# Altium PCB PCB_FourtyPinyGPIOExpander_2021-05-04.pcbdoc
Units mil, origin at the board's own origin, x right, y up, seen from the top; angles counter-clockwise.
Board outline 3200 x 2205 mil, 2 copper layers (Top Layer, Bottom Layer); 17 components, 51 nets, 147 pads, 89 vias.
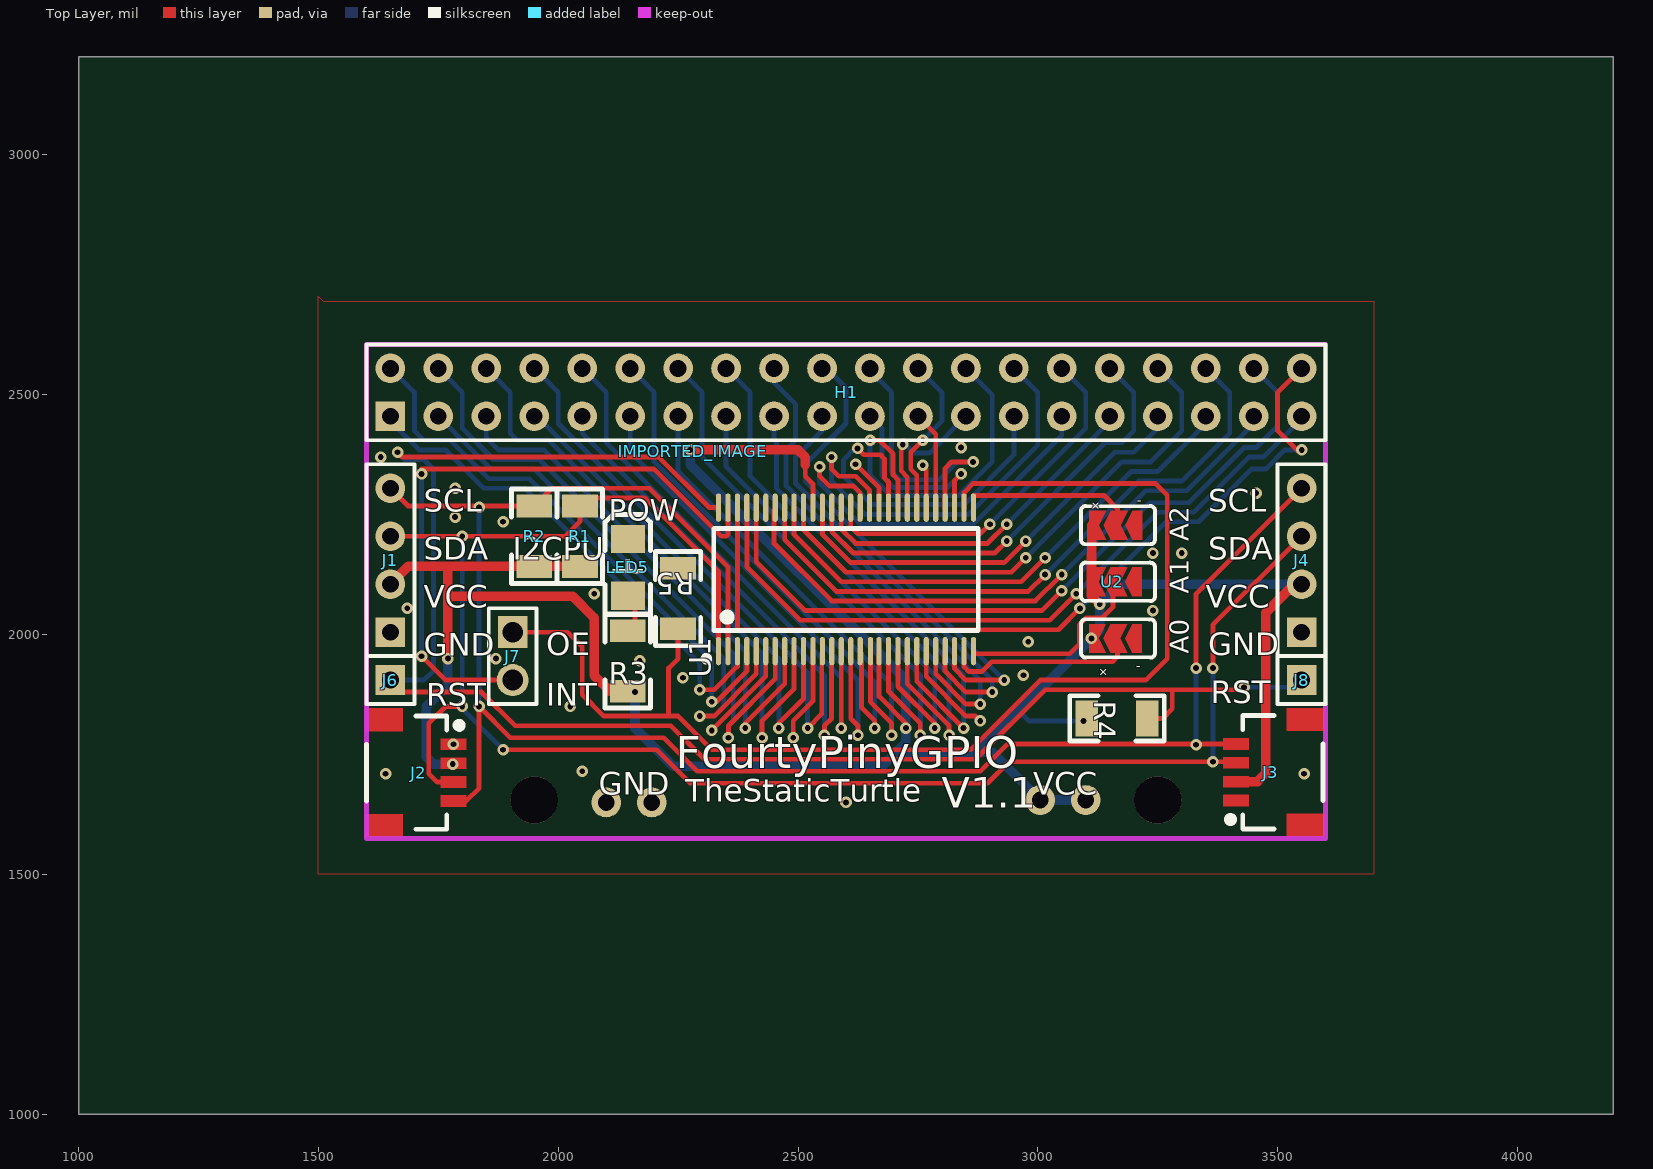
[diagram p0: Top Layer view]
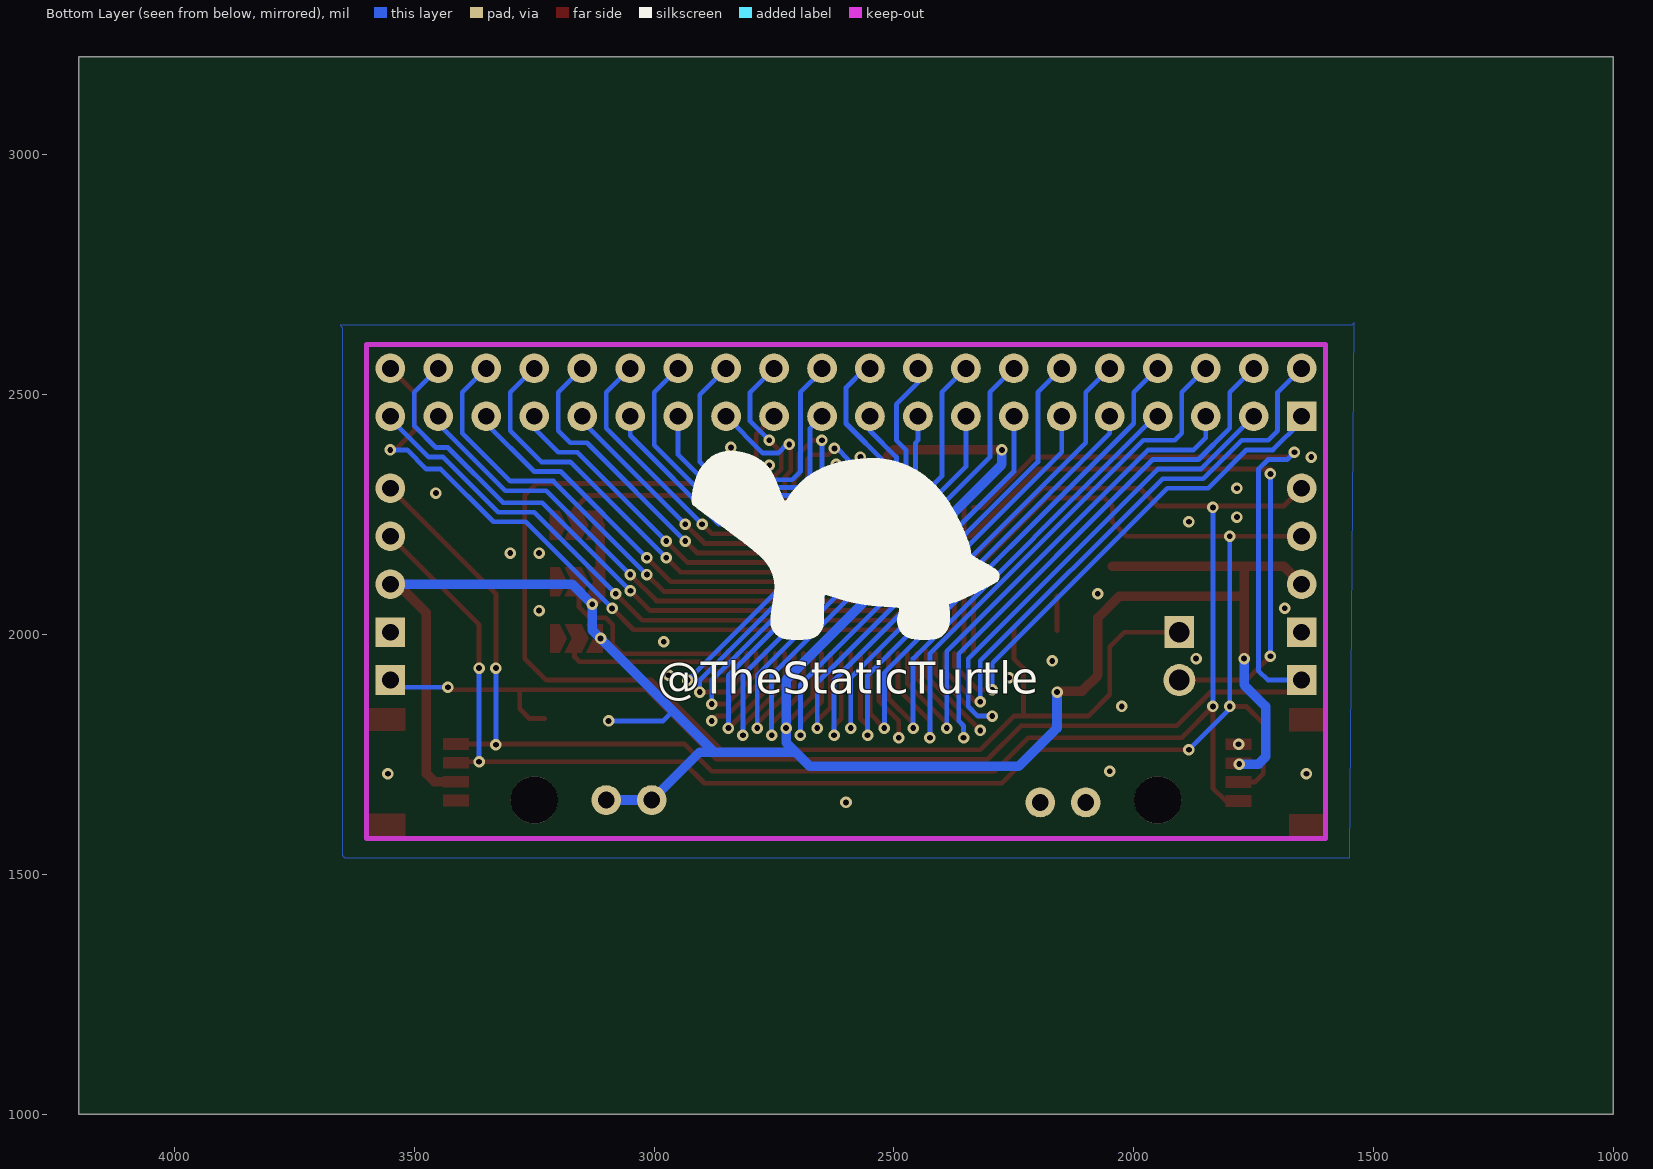
[diagram p1: Bottom Layer view, seen from below]

## Layer stack, top to bottom
Top Layer: signal copper (thickness not stored)
Dielectric: dielectric 12.6, FR-4, Dk 4.8
Bottom Layer: signal copper (thickness not stored)

## Board outline
4200,1000 1000,1000 1000,3205 4200,3205

## Components (designator, comment, footprint, x,y, rotation, side; value= is the part's Value field where it differs from the comment)
H1 "HDR-F-2.54_2x20" HDR-F-2.54_2X20 2600,2505 r0 top
IMPORTED_IMAGE "IMPORTED_IMAGE" IMPORTED_IMAGE 2280.36,2382.49 r0 top
J1 "I2C" HDR-M-2.54_1X4 1650,2155 r90 top
J2 "QWIIC" 1X04_1MM_RA 1690,1720 r270 top
J3 "QWIIC PSTHR" 1X04_1MM_RA 3505,1705 r90 top
J4 "I2C PSTHR" HDR-M-2.54_1X4 3550,2155 r90 top
J6 "RESET" HDR-M-2.54_1X1 1650,1905 r0 top
J7 "CTRLS" HDR-M-2.54_1X2 1905,1955 r270 top
J8 "RESET PSTHR" HDR-M-2.54_1X1 3550,1905 r0 top
LED5 "POW" LED1206-R-RD 2145,2140 r270 top
R1 "1k" R1206 2045,2205 r270 top
R2 "1k" R1206 1950,2205 r270 top
R3 "1k" R1206 2145,1945 r90 top
R4 "1k" R1206 3165,1825 r180 top
R5 "1k" R1206 2250,2075 r90 top
U1 "PCA9505" PCA9505/06 2600,2115 r90 top
U2 "I2C ADDRESS SEL" I2C_ADD_SELECT_PCB 3185,2110 r90 top

## Footprints (in the part's own frame and the unit in brackets; to place one, negate y for a bottom-side part, rotate by r counter-clockwise, add the part's x,y. Pads: shape width x height; smd on the part's side, far side on the other; paste and mask are expansions set on the pad)
1X04_1MM_RA [mm]
  round 0 smd: 1(-1.3,2.325) 2(-0.3,2.325) 3(0.7,2.325) 4(1.7,2.325) NC1(3,-1.35) NC2(-2.6,-1.35)
  Top Layer region: -3.2,-0.35 -2,-0.35 -2,-2.35 -3.2,-2.35
  Top Layer region: 2.4,-0.35 3.6,-0.35 3.6,-2.35 2.4,-2.35
  Top Layer region: -1.6,3 -1,3 -1,1.65 -1.6,1.65
  Top Layer region: -0.6,3 0,3 0,1.65 -0.6,1.65
  Top Layer region: 0.4,3 1,3 1,1.65 0.4,1.65
  Top Layer region: 1.4,3 2,3 2,1.65 1.4,1.65
  silkscreen extent -2.8,-2.28 3.2,2.77
HDR-F-2.54_2X20 [mil]
  rect 62x62 hole 35: 1(-950,-50)
  round 62 hole 35: 2(-950,50) 3(-850,-50) 4(-850,50) 5(-750,-50) 6(-750,50) 7(-650,-50) 8(-650,50) 9(-550,-50) 10(-550,50) 11(-450,-50) 12(-450,50) 13(-350,-50) 14(-350,50) 15(-250,-50) 16(-250,50) 17(-150,-50) 18(-150,50) 19(-50,-50) 20(-50,50) 21(50,-50) 22(50,50) 23(150,-50) 24(150,50) 25(250,-50) 26(250,50) 27(350,-50) 28(350,50) 29(450,-50) 30(450,50) 31(550,-50) 32(550,50) 33(650,-50) 34(650,50) 35(750,-50) 36(750,50) 37(850,-50) 38(850,50) 39(950,-50) 40(950,50)
  silkscreen extent -1000,-100 1000,100
HDR-M-2.54_1X1 [mil]
  rect 62x62 hole 35: 1(0,0)
  silkscreen extent -50,-50 50,50
HDR-M-2.54_1X2 [mm]
  rect 1.7x1.575 hole 1.1: 1(-1.27,0)
  round 1.7 hole 1.1: 2(1.27,0)
  silkscreen extent -2.54,-1.27 2.54,1.27
HDR-M-2.54_1X4 [mil]
  rect 62x62 hole 35: 1(-150,0)
  round 62 hole 35: 2(-50,0) 3(50,0) 4(150,0)
  silkscreen extent -200,-50 200,50
I2C_ADD_SELECT_PCB [mm]
  round 0 smd: 1(-3,1.859) 1(0,1.859) 1(3,1.843) 2(-3,0.716) 3(0,0.716) 4(3,0.7) 5(-3,-0.3) 5(0,-0.3) 5(3,-0.316)
  Top Layer region: -3.762,1.097 -3.762,1.986 -2.238,1.986 -2.238,1.097 -3,1.478
  Top Layer region: -3.762,-0.046 -3.762,0.843 -3,1.224 -2.238,0.843 -2.238,-0.046 -3,0.335
  Top Layer region: -3.762,-0.808 -3.762,-0.3 -3,0.081 -2.238,-0.3 -2.238,-0.808
  Top Layer region: -0.762,1.097 -0.762,1.986 0.762,1.986 0.762,1.097 0,1.478
  Top Layer region: -0.762,-0.046 -0.762,0.843 0,1.224 0.762,0.843 0.762,-0.046 0,0.335
  Top Layer region: -0.762,-0.808 -0.762,-0.3 0,0.081 0.762,-0.3 0.762,-0.808
  Top Layer region: 2.238,-0.062 2.238,0.827 3,1.208 3.762,0.827 3.762,-0.062 3,0.319
  Top Layer region: 2.238,1.081 2.238,1.97 3.762,1.97 3.762,1.081 3,1.462
  Top Layer region: 2.238,-0.824 2.238,-0.316 3,0.065 3.762,-0.316 3.762,-0.824
  silkscreen extent -4.02,-1.5 4.02,2.41
IMPORTED_IMAGE [mil]
LED1206-R-RD [mm]
  rect 1.5x1.8 smd: 1(1.5,0) 2(-1.5,0)
  silkscreen extent -2.8,-1.2 2.5,1.2
PCA9505/06 [mm]
  oval 1.5x0.28 smd: 1(-3.8,6.75) 2(-3.8,6.25) 3(-3.8,5.75) 4(-3.8,5.25) 5(-3.8,4.75) 6(-3.8,4.25) 7(-3.8,3.75) 8(-3.8,3.25) 9(-3.8,2.75) 10(-3.8,2.25) 11(-3.8,1.75) 12(-3.8,1.25) 13(-3.8,0.75) 14(-3.8,0.25) 15(-3.8,-0.25) 16(-3.8,-0.75) 17(-3.8,-1.3) 18(-3.8,-1.75) 19(-3.8,-2.25) 20(-3.8,-2.75) 21(-3.8,-3.25) 22(-3.8,-3.75) 23(-3.8,-4.25) 24(-3.8,-4.75) 25(-3.8,-5.25) 26(-3.8,-5.75) 27(-3.8,-6.25) 28(-3.8,-6.75) 29(3.8,-6.75) 30(3.8,-6.25) 31(3.8,-5.75) 32(3.8,-5.25) 33(3.8,-4.75) 34(3.8,-4.25) 35(3.8,-3.75) 36(3.8,-3.25) 37(3.8,-2.75) 38(3.8,-2.25) 39(3.8,-1.75) 40(3.8,-1.25) 41(3.8,-0.75) 42(3.8,-0.25) 43(3.8,0.25) 44(3.8,0.75) 45(3.8,1.25) 46(3.8,1.75) 47(3.8,2.25) 48(3.8,2.75) 49(3.8,3.25) 50(3.8,3.75) 51(3.8,4.25) 52(3.8,4.75) 53(3.8,5.25) 54(3.8,5.75) 55(3.8,6.25) 56(3.8,6.75)
  silkscreen extent -4.35,-7 2.7,7.55
R1206 [mm]
  rect 1.2x1.9 smd: 1(-1.6,0) 2(1.6,0)
  silkscreen extent -2.5,-1.2 2.5,1.2

## Free pads (board coordinates)
  round 62 hole 35: 19(2100,1650) 19(2195,1650) 19(3005,1655) 19(3100,1655)
  round 98.43 hole 98.43 unplated: ""(1950,1655) ""(3250,1655)

## Via types
v1: diameter 24, hole 12, Top Layer to Bottom Layer, 89 vias

## Nets (pads, with @x,y where several pads share a name; then routed paths per layer and width w, separated by ;. In a path a pad name is that pad's centre, name@x,y a point inside that pad or via, vN(x,y) a via of type N, cw(c..) or ccw(c..) an arc to the next point about the centre after c; other vN are vias at no path point)
GND: J1.1 J2.1 J3.1 J4.1 LED5.2 pad.19@2100,1650 pad.19@2195,1650 R5.2 U1.6 U1.11 U1.23 U1.34 U1.39 U1.51 U2.5 | length 799.4
  Top Layer w10: v1(2320,1800) 2432.68,1912.68 U1.6 ; v1(2490,1785) 2490,1820 2531.1,1861.1 U1.11 ; v1(2620,2355) 2668.95,2306.05 U1.39@2668.95,2280.75 ; v1@2760,2353.15 2767.32,2345.83 U1.34 ; U1.23 2767.3,1912.7 2850,1830 2870,1830 v1(2880,1820)
  other v1: 2600,1650 1640,1710 3555,1710 2050,1715 1781.54,1771.18 2025,1850 2260,1910 2970,1915 2170,1945 1870,1950 2980,1985 3240,2050 1685,2055 2075,2085 3240,2170 3300,2170 1885,2235 1785,2245 3455,2295 1785,2305 2760,2353.15 1630,2370 2840,2390
INT: J7.2 U1.55 | length 1354.9
  Top Layer w10: v1(1715,1955) 1765,1905 J7.2 ; v1(1715,2335) 1715,2345 2200,2345 2340,2205 2350,2205 2353.9,2208.9 U1.55
  Bottom Layer w10: v1(1715,1955) v1(1715,2335)
IO_0: H1.1 U1.3 | length 1044.7
  Top Layer w10: v1(2295,1885) 2325,1885 2373.6,1933.6 U1.3@2373.6,1960.4
  Bottom Layer w10.08: H1.1 1650,2445 1710,2385 1765,2385 1845,2305 1930,2305 2295,1940 v1(2295,1885)
IO_1: H1.2 U1.4 | length 1191.2
  Top Layer w10: v1(2320,1860) 2330,1860 2393.3,1923.3 U1.4@2393.3,1960.4
  Bottom Layer w10.08: H1.2 1700,2505 1700,2425 1720,2405 1775,2405 1855,2325 1940,2325 2320,1945 v1(2320,1860)
IO_2: H1.3 U1.5 | length 1159.3
  Top Layer w10: v1(2295,1830) 2325,1830 2413,1918 U1.5@2413,1960.4
  Bottom Layer w10.08: H1.3 1860,2345 1950,2345 2345,1950 2345,1850 2325,1830 v1(2295,1830)
IO_3: H1.4 U1.7 | length 1300.3
  Top Layer w10: v1(2355,1785) 2355,1810 2452.4,1907.4 U1.7@2452.4,1960.4
  Bottom Layer w10.08: H1.4 1800,2505 1800,2430 1865,2365 1960,2365 2365,1960 2365,1820 2355,1810 v1(2355,1785)
IO_4: H1.5 U1.8 | length 1118.7
  Top Layer w10: v1(2390,1805) 2390,1815 2472.1,1897.1 U1.8@2472.1,1960.4
  Bottom Layer w10.08: H1.5 1850,2410 1875,2385 1970,2385 2390,1965 v1(2390,1805)
IO_5: H1.6 U1.9 | length 1249.3
  Top Layer w10: v1(2425,1785) 2425,1820 2491.7,1886.7 U1.9@2491.7,1960.4
  Bottom Layer w10.08: H1.6 1900,2505 1900,2420 1915,2405 1980,2405 2425,1960 v1(2425,1785)
IO_6: H1.7 U1.10 | length 1040.9
  Top Layer w10: v1(2460,1805) 2460,1815 2511.4,1866.4 U1.10@2511.4,1960.4
  Bottom Layer w10.08: H1.7 1955,2455 2460,1950 v1(2460,1805)
IO_7: H1.8 U1.12 | length 1153.7
  Top Layer w10: v1(2520,1805) 2549.5,1834.5 U1.12@2549.5,1960.4
  Bottom Layer w10.08: H1.8 2000,2505 2000,2440 2520,1920 v1(2520,1805)
IO_8: H1.9 U1.13 | length 1050.4
  Top Layer w10: v1(2555,1790) 2555,1810 2570,1825 U1.13@2570,1960
  Bottom Layer w10.08: H1.9 2050,2420 2555,1915 v1(2555,1790)
IO_9: H1.10 U1.14 | length 1129.2
  Top Layer w10: v1(2590,1805) 2590,1815 2590.2,1815.2 U1.14@2590.2,1960.4
  Bottom Layer w10.08: H1.10 2100,2505 2100,2400 2590,1910 v1(2590,1805)
IO_10: H1.11 U1.15 | length 1038.4
  Top Layer w10: U1.15@2610,1960.4 2610,1825 2625,1810 v1(2625,1790)
  Bottom Layer w10.08: H1.11 2150,2380 2625,1905 v1(2625,1790)
IO_11: H1.12 U1.16 | length 1127.8
  Top Layer w10: U1.16@2632.5,1960.2 2632.5,1847.5 2660,1820 v1(2660,1805)
  Bottom Layer w10.08: H1.12 2200,2505 2200,2360 2660,1900 v1(2660,1805)
IO_12: H1.13 U1.17 | length 1037.9
  Top Layer w10: U1.17@2651.2,1960.4 2651.2,1858.8 2695,1815 v1(2695,1790)
  Bottom Layer w10.08: H1.13 2250,2340 2695,1895 v1(2695,1790)
IO_13: H1.14 U1.19 | length 1172.1
  Top Layer w10: U1.19@2688.6,1960.4 2688.6,1881.4 2755,1815 v1(2755,1790)
  Bottom Layer w10.08: H1.14 2300,2505 2300,2370 2755,1915 v1(2755,1790)
IO_14: H1.15 U1.20 | length 1017.4
  Top Layer w10: U1.20@2708.3,1960.4 2708.3,1891.7 2785,1815 v1(2785,1805)
  Bottom Layer w10.08: H1.15 2350,2350 2785,1915 v1(2785,1805)
IO_15: H1.16 U1.21 | length 1164.1
  Top Layer w10: U1.21@2727.9,1960.4 2727.9,1897.1 2815,1810 v1(2815,1790)
  Bottom Layer w10.08: H1.16 2400,2505 2400,2330 2815,1915 v1(2815,1790)
IO_16: H1.17 U1.22 | length 1009.4
  Top Layer w10: U1.22@2747.6,1960.4 2747.6,1902.4 v1(2845,1805)
  Bottom Layer w10.08: H1.17 2450,2405 2455,2400 2455,2305 2845,1915 v1(2845,1805)
IO_17: H1.18 U1.24 | length 1056.2
  Top Layer w10: U1.24@2787,1960.4 2787,1918 2850,1855 v1(2880,1855)
  Bottom Layer w10.08: H1.18 2450,2525 2495,2480 2495,2405 2475,2385 2475,2310 2880,1905 v1(2880,1855)
IO_18: H1.19 U1.25 | length 920.9
  Top Layer w10: U1.25@2806.7,1960.4 2806.7,1923.3 2850,1880 v1(2905,1880)
  Bottom Layer w10.08: H1.19 2550,2425 2495,2370 2495,2315 2905,1905 v1(2905,1880)
IO_19: H1.20 U1.26 | length 1028.9
  Top Layer w10: U1.26@2826.4,1960.4 2826.4,1928.6 2850,1905 v1(2930,1905)
  Bottom Layer w10.08: H1.20 2560,2555 2600,2515 2600,2440 2515,2355 2515,2320 v1(2930,1905)
IO_20: H1.21 U1.31 | length 397.2
  Top Layer w10: U1.31 2826.38,2321.38 v1(2840,2335)
  Bottom Layer w10: H1.21 2675,2430 2675,2331.3 2699.8,2306.5 2811.5,2306.5 v1(2840,2335)
IO_21: H1.22 U1.32 | length 570.9
  Top Layer w10: U1.32 2806.7,2346.7 2820,2360 v1(2865,2360)
  Bottom Layer w10: H1.22@2647.5,2552.5 2695,2505 2695,2339.8 2712.2,2322.6 2794.1,2322.6 2831.5,2360 v1(2865,2360)
IO_22: H1.23 U1.33 | length 205.7
  Top Layer w10: H1.23 2787.01,2417.99 U1.33
IO_23: H1.24 U1.35 | length 343.3
  Top Layer w10: U1.35 2747.6,2332.4 2735,2345 2735,2380 v1(2760,2405)
  Bottom Layer w10: H1.24 2800,2505 2800,2445 v1(2760,2405)
IO_24: H1.25 U1.36 | length 309.7
  Top Layer w10: v1@2718.15,2396.48 2715,2393.33 2715,2341.11 2727.9,2328.21 U1.36@2727.9,2264.6
  Bottom Layer w10: v1(2718.15,2396.48) 2723.5,2396.5 2741.7,2378.3 2773.3,2378.3 H1.25
IO_25: H1.26 U1.37 | length 768.2
  Top Layer w10: v1(2650.22,2405.27) 2669.73,2405.27 2698.15,2376.85 2698.15,2332.78 2708.3,2322.62 U1.37
  Bottom Layer w10: v1(2650.22,2405.27) 2650.2,2332.4 2692.6,2290 2835,2290 2905,2360 2905,2500 H1.26
IO_26: H1.27 U1.38 | length 746.4
  Top Layer w10: v1(2624.01,2388.15) 2637.1,2375 2671.9,2375 2680.2,2366.7 2680.2,2326.5 2688.6,2318.1 U1.38
  Bottom Layer w10: v1@2624.01,2388.15 2618.63,2388.15 2595,2364.52 2595,2330 2653.9,2271.1 2846.1,2271.1 2950,2375 H1.27
IO_27: H1.28 U1.40 | length 908.5
  Top Layer w10: v1(2570,2370) 2570,2345 2585,2330 2620,2330 2649.2,2300.8 U1.40
  Bottom Layer w10: v1(2570,2370) 2570,2320 2640,2250 2855,2250 3000,2395 3000,2505 H1.28
IO_28: H1.29 U1.41 | length 841.5
  Top Layer w10: v1(2545,2350) 2545,2330 2565,2310 2615,2310 2629.5,2295.5 U1.41
  Bottom Layer w10: v1(2545,2350) 2545,2315 2630,2230 2865,2230 3050,2415 H1.29
IO_29: H1.30 U1.42 | length 767.7
  Top Layer w10: U1.42@2609.8,2259.6 2609.8,2225.2 2625,2210 2880,2210 v1(2900,2230)
  Bottom Layer w10: v1(2900,2230) 3100,2430 3100,2505 H1.30
IO_30: H1.31 U1.43 | length 727.6
  Top Layer w10: U1.43@2590.2,2259.6 2590.2,2219.8 2620,2190 2895,2190 v1(2935,2230)
  Bottom Layer w10: v1(2935,2230) 3150,2445 H1.31
IO_31: H1.32 U1.44 | length 949.4
  Top Layer w10: U1.44@2570.5,2259.6 2570.5,2214.5 2615,2170 2910,2170 v1(2935,2195)
  Bottom Layer w10: v1(2935,2195) 3140,2400 3175,2400 3200,2425 3200,2505 H1.32
IO_32: H1.33 U1.45 | length 915.1
  Top Layer w10: U1.45@2550.8,2259.6 2550.8,2209.2 2610,2150 2930,2150 v1(2975,2195)
  Bottom Layer w10: v1(2975,2195) 3160,2380 3200,2380 3250,2430 H1.33
IO_33: H1.34 U1.47 | length 1139.2
  Top Layer w10: U1.47@2511.4,2259.6 2511.4,2218.6 2600,2130 2945,2130 v1(2975,2160)
  Bottom Layer w10: v1(2975,2160) 3175,2360 3235,2360 3300,2425 3300,2505 H1.34
IO_34: H1.35 U1.48 | length 1107
  Top Layer w10: U1.48 2491.7,2208.3 2590,2110 2965,2110 v1(3015,2160)
  Bottom Layer w10: v1(3015,2160) 3195,2340 3250,2340 3350,2440 H1.35
IO_35: H1.36 U1.49 | length 1331.7
  Top Layer w10: U1.49@2472.1,2264.6 2472.1,2197.9 2580,2090 2980,2090 v1(3015,2125)
  Bottom Layer w10: v1(3015,2125) 3210,2320 3300,2320 3400,2420 3400,2505 H1.36
IO_36: H1.37 U1.50 | length 1287.8
  Top Layer w10: U1.50@2449.9,2259.8 2449.9,2190.1 2570,2070 2995,2070 v1(3050,2125)
  Bottom Layer w10: v1(3050,2125) 3225,2300 3310,2300 3450,2440 H1.37
IO_37: H1.38 U1.52 | length 1542.1
  Top Layer w10: U1.52 2413,2152 2515,2050 3008.2,2050 v1(3049.37,2091.21)
  Bottom Layer w10: v1(3049.37,2091.21) 3233.16,2275 3315,2275 3430,2390 3455,2390 3500,2435 3500,2505 H1.38
IO_38: H1.39 U1.53 | length 1504.8
  Top Layer w10: U1.53 2393.3,2141.7 2505,2030 3025,2030 v1(3080,2085)
  Bottom Layer w10: v1(3080,2085) 3250,2255 3325,2255 3440,2370 3470,2370 3550,2450 H1.39
IO_39: H1.40 U1.54 | length 1798.6
  Top Layer w10: U1.54@2373.6,2259.6 2373.6,2010 3043.1,2010 v1@3087.7,2054.6
  Top Layer w10.08: v1(3550,2385) 3540,2385 3500,2425 3500,2505 H1.40
  Bottom Layer w10: v1(3087.75,2054.57) 3268.18,2235 3335,2235 3445,2345 3475,2345 3515,2385 v1(3550,2385)
LED5_1: LED5.1 R3.2 | length 72.9
  Top Layer w10: R3.2@2160,2007.99 LED5.1@2160,2080.94
OE: J7.1 R5.1 U1.30 | length 2612.7
  Top Layer w10: J7.1 2020,2005 2050,1975 2050,1875 2095,1830 2250,1830 2320,1760 2860,1760 3005,1905 3225,1905 3270,1950 3270,2290 3245,2315 2865,2315 2846.1,2296.1 U1.30 ; 2224.9,1830 2230,1830 2230,1930 2250,1950 R5.1
RESET: J6.1 J8.1 R4.1 U1.56 | length 3464.8
  Top Layer w10: J6.1 1675,1880 1840,1880 1910,1810 2235,1810 2305,1740 2870,1740 3015,1885 3430,1885 v1(3430,1890) ; v1(1665,2380) 1675,2370 2210,2370 2315.4,2264.6 U1.56@2334.3,2264.6 ; R4.1 3260,1825 3280.1,1845.1 3280.1,1885
  Bottom Layer w10: J6.1 1720,1905 1740,1925 1740,2345 1720,2365 1680,2365 v1(1665,2380) ; v1(3430,1890) 3535,1890 J8.1
SCL: J1.4 J2.4 J3.4 J4.4 R2.1 U1.2 | length 3911.9
  Top Layer w10: J1.4 1687,2268 R2.1 1987,2305 2190,2305 2353.9,2141.1 U1.2 ; J2.4 1808.07,1653.07 1835,1680 v1(1835,1850) 1900,1785 2220,1785 2290,1715 2880,1715 2936.9,1771.9 J3.4 ; v1(3330,1930) 3330,2085 J4.4
  Bottom Layer w10: v1(1835,1850) v1(1835,2265) ; v1(3330,1770) v1(3330,1930)
SDA: J1.3 J2.3 J3.3 J4.3 R1.1 U1.1 | length 3818.3
  Top Layer w10: J1.3 2015.2,2205 2045.1,2235.2 R1.1 2062,2285 2180,2285 2334.3,2130.7 U1.1@2334.3,1965.4 ; J2.3 1747.56,1692.44 1730,1710 1730,1815 1765,1850 v1(1800,1850) ; v1(1885,1760) 2205,1760 2275,1690 2895,1690 2940,1735 3411,1735 J3.3 ; v1(3365,1930) 3365,2020 J4.3
  Bottom Layer w10: v1(1800,2205) v1(1800,1850) 1800,1845 v1(1885,1760) ; v1(3365,1735) v1(3365,1930)
U1_27: U1.27 U2.2 | length 411.7
  Top Layer w10: U1.27 2846.1,1932.6 2855.9,1922.8 2882.8,1922.8 2903.5,1943.5 3156.1,1943.5 3165.9,1953.3 3165.9,1982.8 U2.2
U1_28: U1.28 U2.3 | length 412.7
  Top Layer w10: U1.28 2865.8,1960 3066.4,1960 3086.5,1980.1 3086.5,2020.3 3101.2,2035 3134.1,2035 3156.8,2057.7 U2.3
U1_29: U1.29 U2.4 | length 374.5
  Top Layer w10: U1.29 2865.8,2290 3137.9,2290 3165.9,2262 3165.9,2236.5 U2.4
VCC: J1.2 J2.2 J3.2 J4.2 pad.19@3005,1655 pad.19@3100,1655 R1.2 R2.2 R3.1 R4.2 U1.18 U1.46 U2.1 | length 5715.8
  Top Layer w10: 2515,2370 2515,2330 2531.1,2313.9 U1.46 ; U1.18 2668.9,1871.1 2725,1815 v1(2725,1805)
  Top Layer w20: J1.2 1687.01,2142.01 R2.2 R1.2 ; 1764.88,2142.01 1770,2136.89 v1(1770,1950) 1770,2080 2030,2080 2075,2035 2075,1915 2108,1882 R3.1@2160,1882 ; v1(2275,2385) 2500,2385 2515,2370 2515,2354.4 ; 3112.4,2228.1 3111.8,2110 3111.81,2080.55 v1(3129.25,2063.11) ; J3.2 3458.2,1693.2 3475,1710 3475,2045 3535,2105 J4.2
  Bottom Layer w10: 2960.64,1840.71 2981.35,1820 v1(3095,1820)
  Bottom Layer w20: v1(1770,1950) 1770,1894.98 1725,1850.01 1725,1745 1740,1730 v1(1780,1730) ; v1(2160,1880) 2160,1805 2240,1725 2675,1725 2725,1775 v1(2725,1805) 2725,1905 2275,2355 v1(2275,2385) ; 2705,1755 2874.92,1755 ; pad.19@3100,1655 3005,1655 2905,1755 2874.92,1755 ; J4.2 3171.14,2105 v1(3129.25,2063.11) 3129.25,2009.33 v1(3111.81,1991.89) 2874.92,1755
  other v1: 3129.25,2063.11
pads on no net: J2.NC1 J2.NC2 J3.NC1 J3.NC2

## Polygon pours and split planes (outlines as drawn)
GND on Bottom Layer (solid): 1540,2650 1545,2645 3655,2645 3650,2640 3650,1540 3645,1535 1550,1535
GND on Top Layer (solid): 1500,2705 1510,2695 3700,2695 3700,1500 1500,1500

## Silkscreen, mask and mechanical layers (free items; w line width, h text height)
Top Overlay:
  text "SCL" at 1720,2256.38 h47.24
  text "SCL" at 3355,2256.38 h47.24
  text "SDA" at 1720,2156.38 h47.24
  text "I2CPU" at 1905,2156.38 h47.24
  text "SDA" at 3355,2156.38 h47.24
  text "VCC" at 1720,2056 h47.24
  text "VCC" at 3350,2055.62 h47.24
  text "GND" at 1720,1956 h47.24
  text "OE" at 1975,1956.38 h47.24
  text "GND" at 3355,1956.38 h47.24
  text "RST" at 3360,1856.38 h47.24
  text "RST" at 1725,1851.38 h47.24
  text "INT" at 1975,1851.38 h47.24
  text "FourtyPinyGPIO" at 2245,1721.54 h66.93
  text "GND" at 2085,1666.38 h47.24
  text "VCC" at 2990,1666.38 h47.24
  text "TheStaticTurtle" at 2265,1651.38 h47.24
  text "V1.1" at 2800,1638.5 h62.99
Bottom Overlay:
  text "@TheStaticTurtle" at 2995,1876.54 h66.93
Document:
  lines w0.1: 2599,2101.5 2601,2103.5

## Text inside footprints (layer, text, board x,y; h text height)
U2: Top Overlay "+" at 3123.04,1923.04 h19.68 r315; Top Overlay "+" at 3122.92,2282.31 h19.68 r225; Top Overlay "-" at 3215,1939.84 h19.68 r180; Top Overlay "-" at 3216.5,2285.19 h19.68 r180; Top Overlay "A0" at 3314.68,1960 h39.37 r90; Top Overlay "A2" at 3314.68,2195 h39.37 r90; Top Overlay "A1" at 3314.68,2085 h39.37 r90